# EAGLE board DP_chipKIT_Uno32_bysa (EAGLE 5.07)

Size 69.52 x 53.33 mm. Coordinates in mm from the lower left corner, seen from the top.
Outline: 0,0 69.52,0 69.52,53.33 0,53.33 0,0
Copper layers (1*16): Top 0.035mm / dielectric 1.5mm / Bottom 0.035mm
Design rules "default": minimum track width 10mil, minimum drill 24mil, track to track 8mil, track to pad 8mil, pad to pad 8mil, via to via 8mil, smd to smd 8mil, copper to edge 40mil, drill to drill 8mil, minimum pad ring 10mil, minimum via ring 8mil, stop-mask expansion 4mil, vias tented up to drill 0mil, thermal gap 10mil

## Footprints (pad centres in the part's own frame; a part is rotated, then mirrored left to right if it is on the bottom)
SMC_B = smd 1.6 x 2.4: + -1.5,0; - 1.5,0
C603 = smd 1.1 x 1: 1 -0.85,0; 2 0.85,0
TQFP64-10X10 = smd 1.2 x 0.3: 1 -5.7,3.75; 2 -5.7,3.25; 3 -5.7,2.75; 4 -5.7,2.25; 5 -5.7,1.75; 6 -5.7,1.25; 7 -5.7,0.75; 8 -5.7,0.25; 9 -5.7,-0.25; 10 -5.7,-0.75; 11 -5.7,-1.25; 12 -5.7,-1.75; 13 -5.7,-2.25; 14 -5.7,-2.75; 15 -5.7,-3.25; 16 -5.7,-3.75; 33 5.7,-3.75; 34 5.7,-3.25; 35 5.7,-2.75; 36 5.7,-2.25; 37 5.7,-1.75; 38 5.7,-1.25; 39 5.7,-0.75; 40 5.7,-0.25; 41 5.7,0.25; 42 5.7,0.75; 43 5.7,1.25; 44 5.7,1.75; 45 5.7,2.25; 46 5.7,2.75; 47 5.7,3.25; 48 5.7,3.75 | smd 0.3 x 1.2: 17 -3.75,-5.7; 18 -3.25,-5.7; 19 -2.75,-5.7; 20 -2.25,-5.7; 21 -1.75,-5.7; 22 -1.25,-5.7; 23 -0.75,-5.7; 24 -0.25,-5.7; 25 0.25,-5.7; 26 0.75,-5.7; 27 1.25,-5.7; 28 1.75,-5.7; 29 2.25,-5.7; 30 2.75,-5.7; 31 3.25,-5.7; 32 3.75,-5.7; 49 3.75,5.7; 50 3.25,5.7; 51 2.75,5.7; 52 2.25,5.7; 53 1.75,5.7; 54 1.25,5.7; 55 0.75,5.7; 56 0.25,5.7; 57 -0.25,5.7; 58 -0.75,5.7; 59 -1.25,5.7; 60 -1.75,5.7; 61 -2.25,5.7; 62 -2.75,5.7; 63 -3.25,5.7; 64 -3.75,5.7
SOT223 = smd 1.499 x 2.007: 1 -2.261,-3.15; 2 0.025,-3.15; 3 2.311,-3.15 | smd 3.81 x 2.007: 4 0,3.15
SSOP28 = smd 0.348 x 1.397: 1 -4.225,-3.656; 2 -3.575,-3.656; 3 -2.925,-3.656; 4 -2.275,-3.656; 5 -1.625,-3.656; 6 -0.975,-3.656; 7 -0.325,-3.656; 8 0.325,-3.656; 9 0.975,-3.656; 10 1.625,-3.656; 11 2.275,-3.656; 12 2.925,-3.656; 13 3.575,-3.656; 14 4.225,-3.656; 15 4.225,3.656; 16 3.575,3.656; 17 2.925,3.656; 18 2.275,3.656; 19 1.625,3.656; 20 0.975,3.656; 21 0.325,3.656; 22 -0.325,3.656; 23 -0.975,3.656; 24 -1.625,3.656; 25 -2.275,3.656; 26 -2.925,3.656; 27 -3.575,3.656; 28 -4.225,3.656
HEADER_PRG_1X05 = drill 1.016 square: 1 -5.08,0 | drill 1.016 round: 2 -2.54,0; 3 0,0; 4 2.54,0; 5 5.08,0
SPC4077 = drill 2.997 pad 4.536 round: 1 -3,0 | drill 2.997 pad 4.318 round: 2 0,-4.8; 3 3,0
JP2 = drill 0.914 long: 1 -2.54,0; 2 0,0; 3 2.54,0
1X04 = drill 1.016 octagon: 1 -3.81,0; 2 -1.27,0; 3 1.27,0; 4 3.81,0
1X06 = drill 1.016 octagon: 1 -6.35,0; 2 -3.81,0; 3 -1.27,0; 4 1.27,0; 5 3.81,0; 6 6.35,0
2X08 = drill 1.016 octagon: 1 -8.89,-1.27; 2 -8.89,1.27; 3 -6.35,-1.27; 4 -6.35,1.27; 5 -3.81,-1.27; 6 -3.81,1.27; 7 -1.27,-1.27; 8 -1.27,1.27; 9 1.27,-1.27; 10 1.27,1.27; 11 3.81,-1.27; 12 3.81,1.27; 13 6.35,-1.27; 14 6.35,1.27; 15 8.89,-1.27; 16 8.89,1.27
2X06 = drill 1.016 octagon: 1 -6.35,-1.27; 2 -6.35,1.27; 3 -3.81,-1.27; 4 -3.81,1.27; 5 -1.27,-1.27; 6 -1.27,1.27; 7 1.27,-1.27; 8 1.27,1.27; 9 3.81,-1.27; 10 3.81,1.27; 11 6.35,-1.27; 12 6.35,1.27
2X03 = drill 1.016 octagon: 1 -2.54,-1.27; 2 -2.54,1.27; 3 0,-1.27; 4 0,1.27; 5 2.54,-1.27; 6 2.54,1.27
FB603 = smd 1.3 x 1.5: 1 -0.85,0; 2 0.85,0
LED-805 = smd 1.2 x 1.2: A 0,-1.05; C 0,1.05
HC-49U = smd 5.334 x 1.93: 1 -4.826,0; 2 4.826,0
TC26H = drill 0.813 round: 1 -1.27,0; 2 1.27,0
R603 = smd 1 x 1.1: 1 -0.85,0; 2 0.85,0
TACT_SWITCH_SMALL = smd 1.651 x 0.762: 1 -2.54,1.905; 2 2.54,1.905; 3 -2.54,-1.905; 4 2.54,-1.905
SJ = smd 1.168 x 1.6: 1 -0.762,0; 2 0.762,0
SOT23-BEC = smd 1 x 1.4: B -0.95,-1.1; C 0,1.1; E 0.95,-1.1
CONN_USB_MINI-B = smd 2 x 2.5: BODY@1 -4.45,2.5; BODY@2 4.45,2.5; BODY@3 4.45,-3; BODY@4 -4.45,-3 | smd 0.5 x 3.3: D+ 0,3.1; D- -0.8,3.1; GND 1.6,3.1; ID 0.8,3.1; VUSB -1.6,3.1 | hole 0.9: -2.2,0; 2.2,0

## Placement (x,y rotation side)
C1  10uF  [SMC_B]  -74.93,-3.81 0 top  (outside the outline)
C2  10uF  [SMC_B]  -81.28,-3.81 0 top  (outside the outline)
C3  1uF  [SMC_B]  -86.36,-3.81 0 top  (outside the outline)
C4  0.1uF  [C603]  -93.98,-17.78 0 top  (outside the outline)
C5  0.1uF  [C603]  -93.98,-24.13 0 top  (outside the outline)
C6  0.1uF  [C603]  -93.98,-30.48 0 top  (outside the outline)
C7  0.1uF  [C603]  -109.22,-49.53 0 top  (outside the outline)
C8  0.1uF  [C603]  -127,-76.2 0 top  (outside the outline)
C9  0.1uF  [C603]  -127,-82.55 0 top  (outside the outline)
C10  0.1uF  [C603]  -127,-88.9 0 top  (outside the outline)
C11  0.1uF  [C603]  -127,-95.25 0 top  (outside the outline)
C12  10uF  [SMC_B]  -127,-55.88 0 top  (outside the outline)
C13  30pF  [C603]  -127,-101.6 0 top  (outside the outline)
C14  30pF  [C603]  -127,-107.95 0 top  (outside the outline)
C15  30pF  [C603]  -127,-114.3 0 top  (outside the outline)
C16  30pF  [C603]  -127,-120.65 0 top  (outside the outline)
IC2  PIC32MX320F064H  [TQFP64-10X10]  -33.02,7.62 0 top  (outside the outline)
IC3  REG1117-3.3  [SOT223]  -29.21,24.13 0 top  (outside the outline)
IC4  REG1117-5  [SOT223]  -40.64,24.13 0 top  (outside the outline)
IC5  FT232RL  [SSOP28]  -151.13,-166.37 0 top  (outside the outline)
ICSP1  HEADER_PRG_PIC_ICSPA  [HEADER_PRG_1X05]  -152.4,-175.26 0 top  (outside the outline)
J1  [SPC4077]  8.89,8.89 0 top
JP1  [JP2]  -64.77,43.18 0 top  (outside the outline)
JP2  [1X04]  -49.53,58.42 0 top  (outside the outline)
JP4  [1X06]  39.37,2.54 0 top
JP5  [2X08]  32.38,49.53 180 top
JP6  [JP2]  -73.66,43.18 0 top  (outside the outline)
JP7  [2X08]  54.61,49.53 180 top
JP8  [2X06]  57.15,3.81 0 top
JP9  [JP2]  -17.78,52.07 0 top  (outside the outline)
JP10  [JP2]  -26.67,52.07 0 top  (outside the outline)
JP11  [2X03]  -34.29,43.18 0 top  (outside the outline)
JP12  [JP2]  -35.56,52.07 0 top  (outside the outline)
JP13  [JP2]  -44.45,52.07 0 top  (outside the outline)
L1  [FB603]  -157.48,-184.15 0 top  (outside the outline)
LED1  [LED-805]  -115.57,-57.15 0 top  (outside the outline)
LED2  [LED-805]  -120.65,-57.15 0 top  (outside the outline)
LED3  [LED-805]  -92.71,-11.43 0 top  (outside the outline)
LED4  [LED-805]  -130.81,-132.08 0 top  (outside the outline)
LED5  [LED-805]  -135.89,-132.08 0 top  (outside the outline)
Q1  8Mhz  [HC-49U]  -120.65,-129.54 0 top  (outside the outline)
Q2  32.768KHz  [TC26H]  -16.51,17.78 0 top  (outside the outline)
R1  1K  [R603]  -93.98,-36.83 0 top  (outside the outline)
R2  10K  [R603]  -93.98,-43.18 0 top  (outside the outline)
R3  1K  [R603]  -100.33,-43.18 0 top  (outside the outline)
R4  1K  [R603]  -105.41,-43.18 0 top  (outside the outline)
R5  100R  [R603]  -109.22,-43.18 0 top  (outside the outline)
R6  470R  [R603]  -109.22,-55.88 0 top  (outside the outline)
R7  470R  [R603]  -113.03,-55.88 0 top  (outside the outline)
R8  220R  [R603]  -127,-63.5 0 top  (outside the outline)
R9  470R  [R603]  -86.36,-10.16 0 top  (outside the outline)
R10  10K  [R603]  -127,-69.85 0 top  (outside the outline)
R11  470R  [R603]  -137.16,-138.43 0 top  (outside the outline)
R12  470R  [R603]  -137.16,-144.78 0 top  (outside the outline)
R13  4.7K  [R603]  -137.16,-151.13 0 top  (outside the outline)
R14  4.7K  [R603]  -143.51,-151.13 0 top  (outside the outline)
S1  [TACT_SWITCH_SMALL]  -154.94,-156.21 0 top  (outside the outline)
SJ1  [SJ]  -41.91,74.93 0 top  (outside the outline)
T1  [SOT23-BEC]  -142.24,-158.75 0 top  (outside the outline)
T2  [SOT23-BEC]  -147.32,-158.75 0 top  (outside the outline)
USB1  CON-USB-MINI-BUSB1  [CONN_USB_MINI-B]  6.35,38.1 270 top

## Library data of the parts
C1-C16 IC5 ICSP1 L1 LED1-LED5 Q1 R1-R14 S1 T1 T2 USB1 = dp_devices
IC2 = microchip; MPN: PIC32MX320F064H-80I/PT; OC_FARNELL: 1778934; OC_NEWARK: 77M3147
IC3 IC4 = burr-brown; MPN: REG1117; OC_FARNELL: 1097566; OC_NEWARK: 14P6981
J1 = con-jack; OC_FARNELL: unknown; OC_NEWARK: unknown
JP1 JP6 JP9 JP10 JP12 JP13 SJ1 = jumper
JP2 JP4 JP5 JP7 JP8 JP11 = pinhead
Q2 = crystal; OC_FARNELL: unknown; OC_NEWARK: unknown

## Nets
3V3: C3.+ C5.1 C8.1 C9.1 C10.1 C11.1 IC2.10 IC2.19 IC2.26 IC2.38 IC2.57 IC3.2 IC5.4 ICSP1.2 JP4.2 LED4.A LED5.A R6.2 R7.2 R9.1 R10.2
5V0: C2.+ C4.1 IC3.3 IC5.20 JP1.2 JP4.3
A0: IC2.14 JP8.1
A1: IC2.12 JP8.3
A2: IC2.21 JP8.5
A3: IC2.23 JP8.7
A4: IC2.27 JP9.1
A5: IC2.29 JP10.1
A6: IC2.13 JP8.2
A7: IC2.11 JP8.4
A8: IC2.22 JP8.6
A9: IC2.24 JP8.8
A10: IC2.28 JP8.10
A11: IC2.30 JP8.12
CN15/RD6: IC2.54 JP5.6
CN16/RD7: C12.+ IC2.55 JP5.8
D+: IC5.15 USB1.D+
D-: IC5.16 USB1.D-
EXT_5V0: IC4.2 JP1.3
EXT_VIN: C1.+ IC4.3 J1.3 JP4.6
FT232_DTR: C7.1 IC5.2
FT232_RTS: IC5.3 R5.2
GND: C1.- C2.- C3.- C4.2 C5.2 C6.2 C8.2 C9.2 C10.2 C11.2 C12.- C13.2 C14.2 C15.2 C16.2 IC2.9 IC2.20 IC2.25 IC2.41 IC3.1 IC4.1 IC5.7 IC5.18 IC5.21 IC5.25 IC5.26 ICSP1.3 J1.1 J1.2 JP4.4 JP4.5 JP5.13 JP11.6 LED3.C R2.1 S1.1 S1.2 T1.E T2.E USB1.GND
IC1/RTCC/INT1/RD8: IC2.42 JP7.5
IC2/U1CTS/INT2/RD9: IC2.43 JP7.15
IC3/PMCS2/PMA15/INT3/RD10: IC2.44 JP5.1
IC4/PMCS1/PMA14/INT4/RD11: IC2.45 JP5.4
MISO: JP5.9 JP11.1 JP12.2
MOSI: JP5.7 JP11.4 JP13.2
N$1: C6.1 IC5.17
N$2: IC5.19 R1.2 R2.2
N$3: IC5.1 R3.1
N$4: IC5.5 R4.1
N$5: L1.2 USB1.VUSB
N$7: C7.2 R5.1 SJ1.1
N$8: JP5.5 JP6.2
N$9: JP8.9 JP9.2
N$10: JP8.11 JP10.2
N$11: LED1.A R6.1
N$12: LED2.A R7.1
N$15: LED3.A R9.2
N$16: R8.1 R10.1 S1.3 S1.4
N$17: R11.1 T1.C
N$18: LED4.C R11.2
N$19: C13.1 IC2.39 Q1.1
N$20: C14.1 IC2.40 Q1.2
N$21: LED5.C R12.2
N$22: C15.1 IC2.47 Q2.1
N$23: C16.1 IC2.48 Q2.2
N$24: R12.1 T2.C
N$25: IC5.11 JP2.1
N$26: R13.1 T1.B
N$27: R14.1 T2.B
N$28: IC5.9 JP2.2
N$29: IC5.10 JP2.3
N$30: IC5.6 JP2.4
N$31: IC5.23 LED1.C
N$32: IC5.22 LED2.C
N$39: IC2.56
OC1/RD0: IC2.46 JP7.7
OC2/RD1: IC2.49 JP7.11
OC3/RD2: IC2.50 JP7.13
OC4/RD3: IC2.51 JP5.3
P32_PGC: IC2.17
P32_PGD: IC2.18
P32_RST: IC2.7 ICSP1.1 JP4.1 R8.2 SJ1.2
PGC: ICSP1.5
PGD: ICSP1.4
PMA8/U2TX/SCL2/CN18/RF5: IC2.32 JP5.14
PMA9/U2RX/SDA2/CN17/RF4: IC2.31 JP5.12
PMD0/RE0: IC2.60 JP7.2
PMD1/RE1: IC2.61 JP7.4
PMD2/RE2: IC2.62 JP7.6
PMD3/RE3: IC2.63 JP7.8
PMD4/RE4: IC2.64 JP7.10
PMD5/RE5: IC2.1 JP7.12
PMD6/RE6: IC2.2 JP7.14
PMD7/RE7: IC2.3 JP7.16
PMRD/CN14/RD5: IC2.53 JP5.2
PMWR/OC5/IC5/CN13/RD4: IC2.52 JP6.1
RF0: IC2.58 R14.2
RF1: IC2.59 JP7.9
SCK2/RG6: IC2.4 JP5.11 JP11.3 R13.2
SCL1/RG2: IC2.37 JP10.3
SDA1/RG3: IC2.36 JP9.3
SDI2/RG7: IC2.5 JP12.1 JP13.3
SDO2/RG8: IC2.6 JP12.3 JP13.1
SS2/RG9: IC2.8 JP6.3 JP11.5
U1RTS/BCLK1/SCK1/INT0/RF6: IC2.35 JP5.10
U1RX: R3.2
U1RX/SDI1/RF2: IC2.34 JP7.1
U1TX: R4.2
U1TX/SDO1/RF3: IC2.33 JP7.3
USB_5V0: JP1.1 L1.1 R1.1
VREF+/AN0: IC2.16 JP5.15
VREF-/AN1: IC2.15 JP5.16

## Tracks (layer width: path | path; a pad name or v marks a point on that pad's centre or on a via)
3V3  (20 unrouted)
5V0  (5 unrouted)
A0  (1 unrouted)
A1  (1 unrouted)
A2  (1 unrouted)
A3  (1 unrouted)
A4  (1 unrouted)
A5  (1 unrouted)
A6  (1 unrouted)
A7  (1 unrouted)
A8  (1 unrouted)
A9  (1 unrouted)
A10  (1 unrouted)
A11  (1 unrouted)
CN15/RD6  (1 unrouted)
CN16/RD7  (2 unrouted)
D+  (1 unrouted)
D-  (1 unrouted)
EXT_5V0  (1 unrouted)
EXT_VIN  (3 unrouted)
FT232_DTR  (1 unrouted)
FT232_RTS  (1 unrouted)
GND  (39 unrouted)
IC1/RTCC/INT1/RD8  (1 unrouted)
IC2/U1CTS/INT2/RD9  (1 unrouted)
IC3/PMCS2/PMA15/INT3/RD10  (1 unrouted)
IC4/PMCS1/PMA14/INT4/RD11  (1 unrouted)
MISO  (2 unrouted)
MOSI  (2 unrouted)
N$1  (1 unrouted)
N$2  (2 unrouted)
N$3  (1 unrouted)
N$4  (1 unrouted)
N$5  (1 unrouted)
N$7  (2 unrouted)
N$8  (1 unrouted)
N$9  (1 unrouted)
N$10  (1 unrouted)
N$11  (1 unrouted)
N$12  (1 unrouted)
N$15  (1 unrouted)
N$16  (3 unrouted)
N$17  (1 unrouted)
N$18  (1 unrouted)
N$19  (2 unrouted)
N$20  (2 unrouted)
N$21  (1 unrouted)
N$22  (2 unrouted)
N$23  (2 unrouted)
N$24  (1 unrouted)
N$25  (1 unrouted)
N$26  (1 unrouted)
N$27  (1 unrouted)
N$28  (1 unrouted)
N$29  (1 unrouted)
N$30  (1 unrouted)
N$31  (1 unrouted)
N$32  (1 unrouted)
OC1/RD0  (1 unrouted)
OC2/RD1  (1 unrouted)
OC3/RD2  (1 unrouted)
OC4/RD3  (1 unrouted)
P32_RST  (4 unrouted)
PMA8/U2TX/SCL2/CN18/RF5  (1 unrouted)
PMA9/U2RX/SDA2/CN17/RF4  (1 unrouted)
PMD0/RE0  (1 unrouted)
PMD1/RE1  (1 unrouted)
PMD2/RE2  (1 unrouted)
PMD3/RE3  (1 unrouted)
PMD4/RE4  (1 unrouted)
PMD5/RE5  (1 unrouted)
PMD6/RE6  (1 unrouted)
PMD7/RE7  (1 unrouted)
PMRD/CN14/RD5  (1 unrouted)
PMWR/OC5/IC5/CN13/RD4  (1 unrouted)
RF0  (1 unrouted)
RF1  (1 unrouted)
SCK2/RG6  (3 unrouted)
SCL1/RG2  (1 unrouted)
SDA1/RG3  (1 unrouted)
SDI2/RG7  (2 unrouted)
SDO2/RG8  (2 unrouted)
SS2/RG9  (2 unrouted)
U1RTS/BCLK1/SCK1/INT0/RF6  (1 unrouted)
U1RX/SDI1/RF2  (1 unrouted)
U1TX/SDO1/RF3  (1 unrouted)
USB_5V0  (2 unrouted)
VREF+/AN0  (1 unrouted)
VREF-/AN1  (1 unrouted)